# EAGLE board MApping Car (EAGLE 9.6.2)
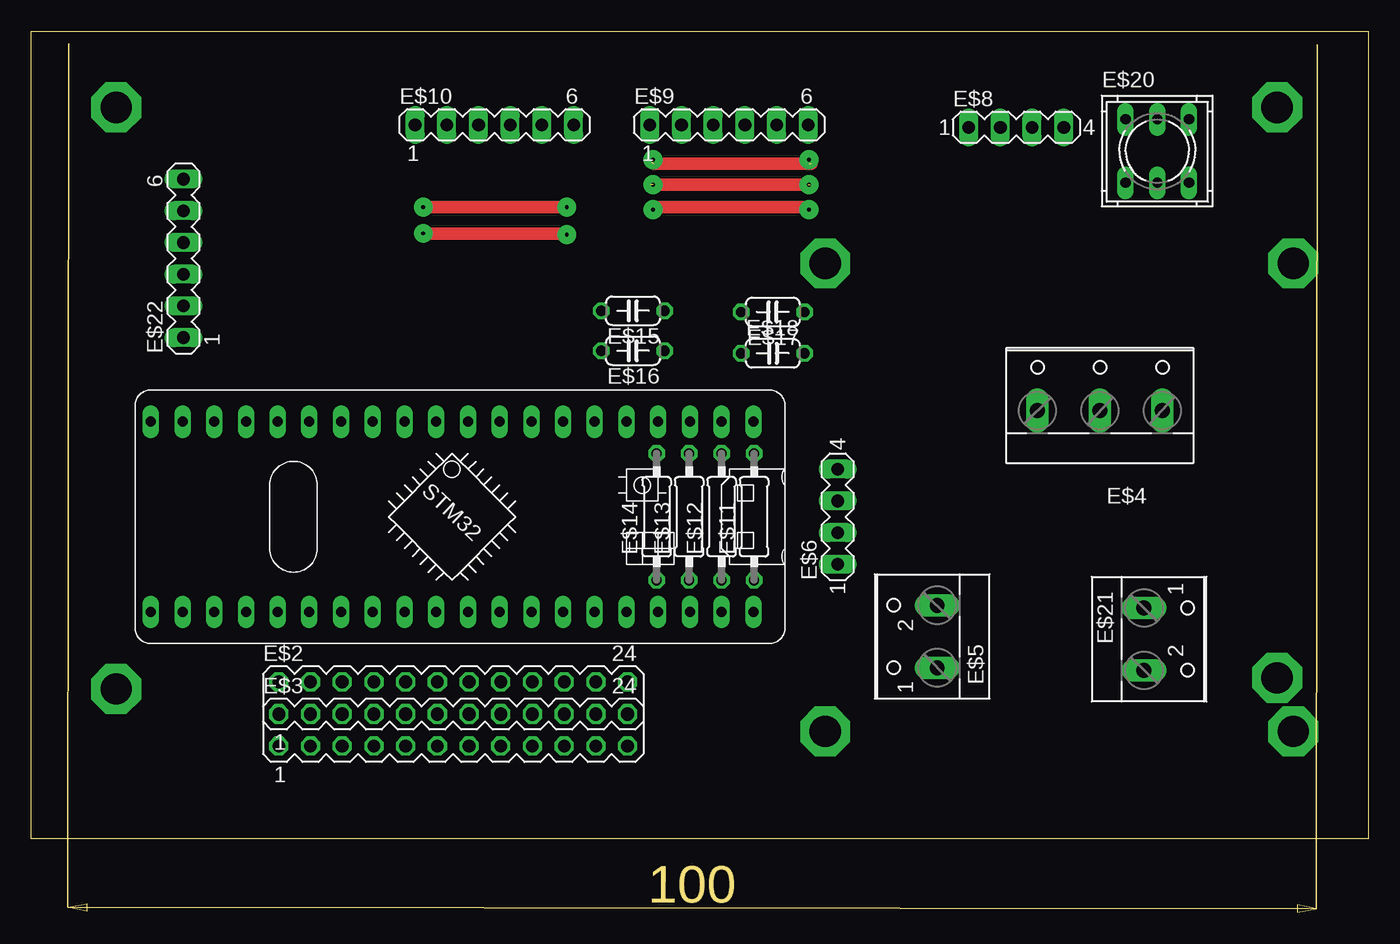
[diagram p0: board, top side]
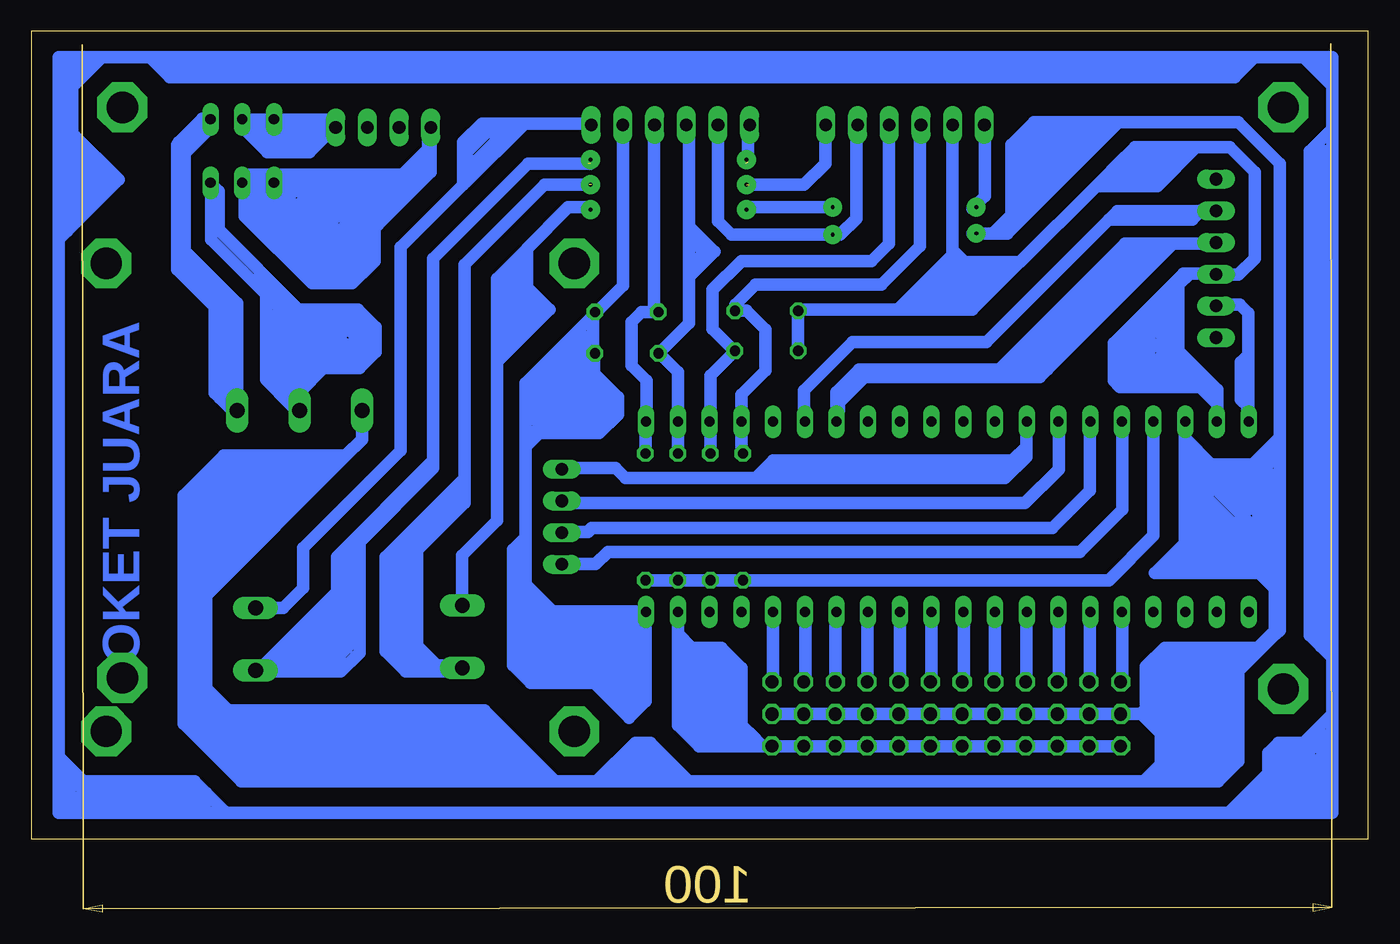
[diagram p1: board, bottom side, seen from below]

Size 107.1 x 64.7 mm. Coordinates in mm from the lower left corner, seen from the top.
Outline: 0,64.7 107.1,64.7 107.1,0 0,0 0,64.7
Copper layers (1*16): Top 0.035mm / dielectric 1.5mm / Bottom 0.035mm
Design rules "default *": minimum track width 6mil, minimum drill 0.35mm, track to track 0mil, track to pad 0mil, pad to pad 6mil, via to via 6mil, smd to smd 6mil, copper to edge 0mil, drill to drill 0mil, minimum pad ring 10mil, minimum via ring 8mil, stop-mask expansion 4mil, vias tented up to drill 0mil, thermal gap 0mil

## Footprints (pad centres in the part's own frame; a part is rotated, then mirrored left to right if it is on the bottom)
BLUE_PILL = drill 0.8 long: P$1 -7.62,15.24; P$2 -7.62,12.7; P$3 -7.62,10.16; P$4 -7.62,7.62; P$5 -7.62,5.08; P$6 -7.62,2.54; P$7 -7.62,0; P$8 -7.62,-2.54; P$9 -7.62,-5.08; P$10 -7.62,-7.62; P$11 -7.62,-10.16; P$12 -7.62,-12.7; P$13 -7.62,-15.24; P$14 -7.62,-17.78; P$15 -7.62,-20.32; P$16 -7.62,-22.86; P$17 -7.62,-25.4; P$18 -7.62,-27.94; P$19 -7.62,-30.48; P$20 -7.62,-33.02; P$21 7.62,15.24; P$22 7.62,12.7; P$23 7.62,10.16; P$24 7.62,7.62; P$25 7.62,5.08; P$26 7.62,2.54; P$27 7.62,0; P$28 7.62,-2.54; P$29 7.62,-5.08; P$30 7.62,-7.62; P$31 7.62,-10.16; P$32 7.62,-12.7; P$33 7.62,-15.24; P$34 7.62,-17.78; P$35 7.62,-20.32; P$36 7.62,-22.86; P$37 7.62,-25.4; P$38 7.62,-27.94; P$39 7.62,-30.48; P$40 7.62,-33.02
MA12-2 = drill 1.016 octagon: 1 -13.97,-1.27; 2 -13.97,1.27; 3 -11.43,-1.27; 4 -11.43,1.27; 5 -8.89,-1.27; 6 -8.89,1.27; 7 -6.35,-1.27; 8 -6.35,1.27; 9 -3.81,-1.27; 10 -3.81,1.27; 11 -1.27,-1.27; 12 -1.27,1.27; 13 1.27,-1.27; 14 1.27,1.27; 15 3.81,-1.27; 16 3.81,1.27; 17 6.35,-1.27; 18 6.35,1.27; 19 8.89,-1.27; 20 8.89,1.27; 21 11.43,-1.27; 22 11.43,1.27; 23 13.97,-1.27; 24 13.97,1.27
W237-103 = drill 1.194 long: 1 -5,-1.29; 2 0,-1.29; 3 5,-1.29
W237-102 = drill 1.194 long: 1 -2.5,-1.27; 2 2.5,-1.27
MA04-1 = drill 1.016 long: 1 -3.81,0; 2 -1.27,0; 3 1.27,0; 4 3.81,0
MA06-1 = drill 1.016 long: 1 -6.35,0; 2 -3.81,0; 3 -1.27,0; 4 1.27,0; 5 3.81,0; 6 6.35,0
0207/10 = drill 0.813 octagon: 1 -5.08,0; 2 5.08,0
C050-024X044 = drill 0.813 octagon: 1 -2.54,0; 2 2.54,0
9077-2 = drill 0.813 long: 1 -2.54,2.54; 2 0,2.54; 3 2.54,2.54; 4 -2.54,-2.54; 5 0,-2.54; 6 2.54,-2.54

## Placement (x,y rotation side)
E$1  [BLUE_PILL]  42.6,25.8 270 top
E$2  [MA12-2]  33.8,11.3 0 top
E$3  [MA12-2]  33.8,8.7 0 top
E$4  [W237-103]  85.6,35.6 0 top
E$5  [W237-102]  71.3,16.2 90 top
E$6  [MA04-1]  64.6,25.8 90 top
E$8  [MA04-1]  78.9,57 0 top
E$9  [MA06-1]  55.9,57.2 0 top
E$10  [MA06-1]  37.1,57.2 0 top
E$11  [0207/10]  57.9,25.8 90 top
E$12  [0207/10]  55.3,25.8 90 top
E$13  [0207/10]  52.7,25.8 90 top
E$14  [0207/10]  50.1,25.8 90 top
E$15  [C050-024X044]  48.2,42.3 180 top
E$16  [C050-024X044]  48.2,39.1 180 top
E$17  [C050-024X044]  59.4,42.2 180 top
E$18  [C050-024X044]  59.4,38.9 0 top
E$20  [9077-2]  90.2,55.1 0 top
E$21  [W237-102]  90.4,16 270 top
E$22  [MA06-1]  12.2,46.5 90 top

## Library data of the parts
E$1 = BluePill
E$2 E$3 E$6 E$8-E$10 E$22 = con-lstb
E$4 E$5 E$21 = con-wago-500
E$11-E$18 = rcl
E$20 = switch-misc

## Tracks (layer width: path | path; a pad name or v marks a point on that pad's centre or on a via)
S$1  (via drill 2.5 pad 4)
  other vias: 6.8,58.6
S$2  (via drill 2.5 pad 4)
  other vias: 99.8,58.6
S$3
  Bottom 1: 19.7,18.2 19.7,12.7 19.9,12.5
S$4
  Bottom 1: 22.3,18.2 22.3,12.6 22.4,12.5
S$5
  Bottom 1: 24.8,18.1 24.8,12.7 24.9,12.6
S$6
  Bottom 1: 27.4,18.1 27.4,12.7 27.5,12.6
S$7
  Bottom 1: 29.9,18.2 29.9,12.7 30,12.6
S$8
  Bottom 1: 32.4,18.2 32.4,12.7 32.6,12.5
S$9
  Bottom 1: 47.7,18.1 47.7,12.8 47.9,12.6
S$10
  Bottom 1: 45.1,18.2 45.1,12.8 45.3,12.6
S$11
  Bottom 1: 42.7,18.4 42.7,12.6
S$12
  Bottom 1: 40.1,18.2 40.1,12.6 40.2,12.5
S$13
  Bottom 1: 37.5,18.2 37.5,12.7 37.6,12.6
S$14
  Bottom 1: 35,18.2 35,12.7 35.1,12.6
S$15
  Bottom 1: 55.3,16.4 55.3,9.1 53.6,7.4 48.5,7.4 | 48.5,7.4 19.8,7.4 | 55.3,18.3 55.3,16.4 | 55.3,16.4 54.2,15.3 51.8,15.3 50.2,13.7 50.2,9.1 49.1,8 | 48.5,7.4 49.1,8 | 49.1,8 53.2,8 54.6,9.4 54.6,14.8 52.5,14.8 50.7,13 50.7,8.7 52.7,8.7 52.8,8.6 54.1,9.9 54.1,14 53,14 52.9,14.1 51.5,12.7 51.5,9.4 52.5,9.4 53.4,10.3 53.4,13.3 53.2,13.3 52.4,12.5 52.4,10.2
S$17
  Bottom 1: 57.9,33.4 57.9,30.9
S$18
  Bottom 1: 55.3,33.4 55.3,31
S$19
  Bottom 1: 50.7,39.1 52.7,37.1 52.7,30.8
S$20
  Bottom 1: 50.2,33.4 50.2,30.9
S$21
  Bottom 1: 57.9,20.7 50.2,20.7
S$22
  Bottom 1: 17.2,33.6 17.2,24.3 20.8,20.7 50.1,20.7
S$23
  Bottom 1: 65.6,29.7 60.3,29.7 59.5,28.9 49.1,28.9 | 49.1,28.9 29.1,28.9 27.4,30.6 27.4,31.4 | 27.4,31.4 27.4,33.5 | 49.1,28.9 47.7,30.3 28.5,30.3 | 28.5,30.3 27.4,31.4 | 28.5,30.3 29,29.8 29,29.6 47.7,29.6
S$24
  Bottom 1: 65.1,26.9 27.5,26.9 24.8,29.6 24.8,33.4
S$25
  Bottom 1: 65.6,24.6 62.5,24.6 62.2,24.9 25.3,24.9 22.3,27.9 22.3,33.3
S$26
  Bottom 1: 65.6,22 61.9,22 60.9,23 23.1,23 19.7,26.4 19.7,33.5
S$27
  Bottom 1: 45.2,33.7 45.2,35.9 41.3,39.8 30.6,39.8 20.8,49.6 | 20.8,49.6 20.1,50.3 12.3,50.3 | 13.3,50.4 14.1,49.6 20.8,49.6
S$28
  Bottom 1: 50.7,42.3 49.8,42.3 48.3,40.8 48.3,37.5 50.2,35.6 50.2,33.5
S$29
  Bottom 1: 55.3,33.5 55.3,37.4 56.8,38.9 54.4,41.3 54.4,45 | 54.4,45.7 54.4,49.1 | 54.4,49.1 54.4,56.44 | 54.4,49.1 52.35,47.05 54.4,45 | 54.4,45 54.4,45.7 | 54.4,45.7 53.15,46.95 53.9,47.7
S$30
  Bottom 1: 57.8,33.5 57.8,36.7 59,37.9 59,41.4 58.2,42.2 57.2,42.2 57.2,57.2
S$31
  Bottom 1: 62.1,42.2 62.1,39.1 62,39
S$32
  Bottom 1: 45.7,42.4 45.7,39.1
S$33
  Bottom 1: 50.8,39.1 52.52,40.82 52.52,44 50.22,46.3 39.8,46.3 38.4,47.7 38.4,57
S$34
  Bottom 1: 50.7,42.2 50.7,42.8 49.1,44.4 39,44.4 35.9,47.5 35.9,57.1
S$35
  Bottom 1: 92.9,57.7 93.4,57.7 95.3,55.8 94.4,55.8 | 94.4,55.8 93.4,56.8 | 94.4,55.8 94.6,55.6 95.4,55.6 95.4,45.6 90.6,40.8 | 92.7,57.8 92.7,57 94.8,54.9 94.8,45.6 90.6,41.4 | 90.6,41.4 90.6,40.8 | 90.6,40.8 90.6,34.4 | 90.6,41.4 90.6,42.9 95.1,47.4 | 95.1,47.4 95.1,48.2 | 95.1,47.4 95.1,46.8 91.3,43
S$36
  Bottom 1: 59.7,57.2 59.7,44.3 67.5,36.5 67.5,31.9 | 62,38.8 62,37.4 67.5,31.9 | 67.5,31.9 67.5,31.4 | 67.5,31.4 67.5,20.4 65.3,18.2 58,18.2 57.9,18.1 | 67.5,31.4 66.4,32.5 61.6,32.5 60.1,34 60.1,35.4 62.7,38 62.7,40.2 66.5,36.4 66.7,36.4 66.8,36.3 66.8,33.6 66.5,33.3 61.9,33.3 60.8,34.4 60.8,34.9 63.2,37.3 63.2,38.6 66.2,35.6 66.2,34.3 62.4,34.3 61.9,33.8 61.7,34 61.7,34.5 63.9,36.7 63.9,36.8 | 63.9,37 63.9,36.8 | 63.9,36.8 65.5,35.2 65.5,35 63.1,35
S$37
  Bottom 1: 41,57.1 41,49.7 42.3,48.4 51,48.4 52.1,49.5 52.1,57.2
S$38
  Bottom 1: 93.8,44.2 92.4,42.8 92.4,35.7 92,35.3 | 90.7,34 92,35.3 | 92,35.3 92,41.1 91.3,40.4 91.3,35.9
S$39
  Bottom 1: 12.4,45.3 14.3,45.3 | 14.3,45.3 15.2,44.4 15.2,39.1 12.1,36 12.1,34.9 | 14.3,45.3 14.8,45.3 20.4,39.7 20.4,36.7 19.9,36.2 13.5,36.2 12.1,34.8 | 12.1,34.8 12.1,33.3 | 12.1,34.8 12.1,34.9 | 12.1,34.9 14.8,37.6 14.9,37.5 14.9,37 19.3,37 19.4,37.1 19.4,39.7 15.8,43.3 | 15.8,43.3 15.8,43.4 | 15.8,43.3 15.8,38.4 15.2,37.8 18.6,37.8 18.6,39.2 16.5,41.3 | 16.5,41.3 16.5,41.7 | 16.5,41.3 16.5,38.4 | 16.4,38.3 16.5,38.4 | 16.5,38.4 17.8,38.4 17.8,38.9 17.1,39.6
S$40
  Top 1: 42.7,48.5 31.6,48.5
S$41  (via drill 2.5 pad 4)
  other vias: 63.6,46.1
S$42  (via drill 2.5 pad 4)
  other vias: 101.1,46.1
S$43  (via drill 2.5 pad 4)
  other vias: 101.1,8.6
S$44  (via drill 2.5 pad 4)
  other vias: 63.6,8.6
S$45
  Bottom 1: 82.8,57 84.8,55 88.2,55 90.2,57 90.2,57.6 83.3,57.6 82.8,57.1 83,56.9 89.2,56.9 | 89.3,56.9 89.2,56.9 | 89.2,56.9 88.1,55.8 84.9,55.8 84.5,56.2 84.7,56.4 87.6,56.4
S$46
  Bottom 1: 75.1,57.2 75.1,53.4 79.3,49.2 | 79.3,49.2 79.6,48.9 79.6,48.8 | 79.6,48.8 86.6,48.8 | 86.6,48.8 88.7,48.8 | 90,50.2 89,49.2 89,49.1 88.7,48.8 | 90,50.2 90,52.6 82.8,52.6 | 90,50.2 90,49.9 84.6,44.5 81.4,44.5 79.6,46.3 79.6,48.8 | 79.3,49.2 79.3,49.7 75.3,53.7 75.3,55.3 | 75.3,56.8 75.3,55.3 | 75.3,55.3 77.4,53.2 82.2,53.2 | 85.7,49.7 86.6,48.8 | 88.7,48.8 84.5,44.6 81.3,44.6 80,45.9 80,49.7 77.2,52.5 | 75.8,53.9 77.2,52.5 | 77.2,52.5 82.4,52.5 87.3,47.6 85,45.3 80.8,45.3 80.8,49.6 78.7,51.7 78.7,52.1 82.2,52.1 86.1,48.2 88,48.2 85.8,46 81.5,46 81.5,49.7 79.9,51.3 82.3,51.3 86.3,47.3 86.3,47.1 85.6,47.1 85.1,46.6 81.9,46.6 81.9,50.1 81.4,50.6 82.3,50.6 82.3,50.2 85,47.5 84.8,47.3 82.7,47.3 82.7,47.9 82.5,48.1 83.9,48.1 | 82.8,52.6 82.2,53.2 | 82.8,52.6 85.7,49.7 | 85.7,49.7 88.7,49.7 88.7,49.9 89.6,50.8 89.6,51.9 84.6,51.9 | 84.1,51.9 84.6,51.9 | 84.6,51.9 86,50.5 88.5,50.5 89,51 88.9,51.1 86.3,51.1 87.7,52.5 90.3,52.5 89.6,53.2 82.2,53.2
S$47
  Bottom 1: 9,21.7 13.7,26.4 14,26.4 14.2,26.6 | 14.7,33.4 14.7,32.1 | 14.7,32.1 14.7,28.4 | 14.7,26.2 11.1,22.6 | 11.1,22.6 9.7,22.6 | 8.92,21.82 7.5,20.4 7.5,20 | 7.5,19.4 7.5,16.7 | 7.5,16.7 8.9,15.3 | 8.9,15.3 10.3,13.9 14.3,13.9 18.2,10 | 18.2,10 47.8,10 | 18.2,10 16.6,8.4 16.6,6 18,4.6 | 18,4.6 54.4,4.6 | 55.6,4.6 61.8,4.6 | 61.8,4.6 65.1,4.6 | 69.2,4.6 90.3,4.6 94.9,9.2 94.9,27.5 91.7,30.7 81.9,30.7 | 81.9,30.7 80.6,32 80.6,34.3 | 14.6,30 13.6,30 | 12.3,30 9.3,30 7.1,32.2 | 7.1,32.2 7.1,54.1 10.4,57.4 20,57.4 | 20,57.4 28.9,48.5 30.1,48.5 | 30.1,48.5 31.7,48.5 | 14.7,32.1 12.6,30 | 12.6,30 12.3,30 | 12.6,30 13.6,30 | 13.6,30 14.1,30.5 | 12.3,30 14.7,27.6 | 14.7,27.6 14.7,26.2 | 14.7,27.6 14.7,28.4 | 14.7,28.4 13.9,29.2 | 14.2,28.7 14.2,27.1 | 14.2,27.1 9.7,22.6 | 9.7,22.6 8.4,21.3 9.7,21.3 | 9.7,21.3 9.8,21.3 | 9.8,21.3 11.1,22.6 | 20,57.4 26.8,57.4 28.6,55.6 28.6,50 | 28.6,50 30.1,48.5 | 28.6,50 21.9,56.7 21.9,56.9 21.2,56.9 21.1,56.8 21.2,56.7 26.5,56.7 27.9,55.3 27.9,51.6 | 27.9,51.6 28,51.5 | 27.9,51.6 23.4,56.1 | 23.4,56.1 23.3,56.1 | 23.4,56.1 26.1,56.1 27.2,55 27.2,53 24.8,55.4 | 24.8,55.4 24.5,55.4 | 24.8,55.4 25.8,55.4 26.3,54.9 26.5,54.9 26.6,54.8 26.6,54.5 | 81.9,30.7 93.1,19.5 93.1,12.1 91.2,10.2 91.1,10.3 70.8,10.3 65.1,4.6 | 65.1,4.6 69.2,4.6 | 69.2,4.6 72.3,7.7 | 74.2,9.1 92.7,9.1 93.8,10.2 | 8.9,15.3 14.9,15.3 | 14.9,15.3 16.3,15.3 17.8,13.8 17.8,10.8 16.5,9.5 16.5,6 17.9,4.6 | 17.9,4.6 18,4.6 | 17.9,4.6 12,4.6 10.4,6.2 10.4,14.7 15.7,14.7 16.9,13.5 16.9,11.9 16.5,11.5 16.5,10.4 16,9.9 16,5.7 16.3,5.4 | 16.4,5.3 16.3,5.4 | 16.3,5.4 12.2,5.4 11,6.6 11,13.2 14.8,13.2 15.4,13.8 16.3,12.9 16.3,11.1 15,9.8 15,6 12.2,6 12,6.2 12,12.3 11.9,12.4 15.1,12.4 15.1,11.9 15.5,11.5 15.5,8.2 14,6.7 12.8,6.7 12.8,11.5 13,11.7 13.3,11.4 14.8,11.4 14.8,10.5 14.1,9.8 14.1,7.8 13.6,7.3 13.4,7.3 13.4,10.2 13.9,10.7 13.8,10.7 13.7,10.6
  Bottom 1: 14.2,26.6 14.2,27.1 | 14.2,26.6 14.2,25.8 9.7,21.3 | 9.8,21.3 17.1,21.3 14.7,23.7 14.7,25.6 | 14.7,26.2 14.7,25.6 | 14.7,25.6 11.3,22.2 11.3,22 15.5,22 15.6,22.1 14.2,23.5 14.2,23.9 13.7,23.9 12.5,22.7 12.6,22.6 14.2,22.6 | 14.4,22.6 14.2,22.6 | 14.2,22.6 13.8,23 | 7.1,32.2 7.1,16.7 7.4,16.4 | 7.5,16.7 7.4,16.8 | 7.4,16.4 7.4,16.8 | 7.4,16.8 7.4,19.5 | 7.4,26.5 7.4,19.5 | 7.4,19.5 7.5,19.4 | 7.5,19.4 7.5,20 | 7.5,20 9.1,21.6 9.1,23.5 13.3,27.7 13.3,28.1 11.9,29.5 8.1,29.5 8.1,21.8 8.3,21.6 13.5,26.8 13.5,27.5 13,27.5 10.9,29.6 8.5,29.6 7.8,30.3 | 7.8,30.3 7.8,30.7 | 7.8,30.3 7.8,30.2 9.5,28.5 10.9,28.5 11.7,27.7 11.9,27.7 8.8,24.6 | 8.8,24.6 8.8,24.1 | 8.8,24.6 8.8,28.3 9.5,27.6 10.8,27.6 | 10.9,27.6 10.8,27.6 | 10.8,27.6 9.6,26.4 9.5,26.5 9.5,26.9 | 61.8,4.6 58.7,7.7 57.5,7.7 54.4,4.6 | 54.4,4.6 55.6,4.6 | 55.6,4.6 57.9,6.9 58.1,6.9 59.8,5.2 | 59.8,5.2 60.1,5.2 | 59.8,5.2 57.1,5.2 | 57.1,5.2 57,5.1 | 57.1,5.2 57.7,5.8 58.1,5.8 | 7.4,16.4 10.4,13.4 11.3,13.4 | 14.9,15.3 14.9,14.3
  Bottom 2: 93.8,10.2 93.8,26.9 90.9,29.8 83.8,29.8 92.4,21.2 92.4,25.6 89.9,28.1 87.5,28.1 | 86.9,28.1 87.5,28.1 | 87.5,28.1 91.1,24.5
  Bottom 3: 72.3,7.7 72.3,8.7 71.9,9.1 68.4,5.6 67.7,5.6 68.6,6.5 90.1,6.5 93.4,9.8 93.4,10.3 93,10.3 91.5,8.8 74.5,8.8 74.2,9.1
S$48
  Bottom 1: 57.9,18.2 57.9,11 59.2,9.7 62,12.5 67.1,12.5 68.5,13.9 68.5,23.2 67.6,24.1 67.6,14 66.8,13.2 58.5,13.2 58.4,13.3 58.4,17.3 58.3,17.4 58.5,17.6 66.4,17.6 67.2,18.4 67.2,18.9 66.8,18.9 66.2,18.3 67,17.5 67,14.1 66.7,13.8 58.9,13.8 58.9,16.5 59.3,16.9 66.4,16.9 66.4,14.6 66.3,14.5 59.8,14.5 59.8,16 59.7,16.1 59.8,16.2 65.5,16.2 65.5,15.7 65.7,15.5 65.6,15.4 60.7,15.4 60.7,13 61.2,12.5 61.1,12.4 58.6,12.4 58.6,11.4 59.3,10.7 59.3,10.6 60.4,11.7 60.4,11.8 59.4,11.8 59.3,11.7
S$49  (2 unrouted)
  Top 1: 49.9,54.1 62.5,54.1
  Bottom 1: 49.7,57.1 49.7,54.2 | 62.3,54.1 67.3,54.1 74.9,46.5 74.9,30.3 | 74.9,30.3 82.6,22.6 82.6,22.1 | 82.6,19.8 82.6,16.6 85.7,13.5 89.1,13.5 | 74.9,30.3 74.9,29.7 80.8,23.8 80.8,14.9 82.3,13.4 89,13.4 82.6,19.8 | 82.6,19.8 82.6,22.1 | 82.6,22.1 81.8,22.9 | 81.7,23 81.8,22.9 | 81.8,22.9 81.8,15.3 83,14.1 87.2,14.1 83.1,18.2 83.1,16.5 82.5,15.9 83.5,14.9 83.5,14.7 85.6,14.7 | 85.8,14.7 85.6,14.7 | 85.6,14.7 83.7,16.6
S$50
  Bottom 1: 62.2,57.3 67.6,57.3 | 67.6,57.3 72.3,52.6 | 72.5,52.4 77.5,47.4 77.5,31.1 85.3,23.3 85.3,20.1 86.9,18.5 89.1,18.5 | 67.6,57.3 71,57.3 72.5,55.8 72.5,52.4 | 72.5,52.4 72.3,52.6 | 72.3,52.6 72.3,54.9 70.6,56.6 69.2,56.6 71.5,54.3 71.7,54.3
S$51  (2 unrouted)
  Top 1: 49.6,52.4 62.4,52.4
  Bottom 1: 43.5,57.1 43.5,54.1 45.2,52.4 49.8,52.4 | 62.2,52.4 66,52.4 72.4,46 72.4,28.9 | 72.4,28.9 72.4,26.9 76.2,23.1 76.2,15.5 74.4,13.7 72.8,13.7 | 72.4,28.9 78.7,22.6 78.7,15 77.1,13.4 73.1,13.4 72.8,13.7 | 72.8,13.7 73,13.9 76.6,13.9 76,14.5 76.2,14.5 76.6,14.9 | 76.6,14.9 76.6,14.3 | 76.6,14.9 76.6,23.9 | 76.6,23.9 73.2,27.3 | 76.6,23.9 77.8,22.7 77.8,15.2 77.2,14.6 | 77.2,14.6 77.2,14.5 | 77.2,14.6 77.2,22.4 | 77.2,22.4 77.3,22.5 | 77.2,22.4 77,22.2 76.9,22.2
S$52  (via drill 0.3 pad 1.5)
  Top 1: 62.3,50.6 49.8,50.6 | 42.7,50.6 31.8,50.6 31.7,50.5
  Bottom 1: 72.6,18.7 72.6,22.7 69.8,25.5 69.8,38.2 | 69.8,39 69.8,44.9 67.4,47.3 | 67.4,47.3 64.1,50.6 62.3,50.6 | 49.8,50.6 v42.9,50.6 42.7,50.6 | 31.7,50.5 30.7,51.5 30.7,57.2 | 67.4,47.3 67.4,44.2 65.6,42.4 69.8,38.2 | 69.8,38.2 69.8,39 | 69.8,39 68,40.8 68,45.6 | 68,45.7 68,45.6 | 68,45.6 69,44.6 69,40.5 68.9,40.4 67,42.3 66.7,42.3 67.6,43.2
S$53
  Bottom 1: 92.7,52.6 92.7,52.5 | 92.7,52.5 92.1,51.9 92.1,48.8 | 85.6,34.3 85.6,40.9 88.3,43.6 | 88.3,43.6 92.7,48 92.7,49.4 | 92.7,49.4 92.7,52.5 | 92.7,49.4 92.1,48.8 | 92.1,48.8 85.7,42.4 80.9,42.4 79.5,41 79.5,39 80.8,37.7 83.7,37.7 85.6,35.8 | 85.6,35.8 85.6,34.2 | 85.6,35.8 85.6,36.9 83.9,38.6 81.2,38.6 80.3,39.5 80.3,40.5 81.2,41.4 81.2,41.6 85.9,41.6 84.9,40.6 84.9,38.3 83.6,39.6 81.5,39.6 81,40.1 81.6,40.7 84.2,40.7 84.3,40.8 | 84.4,40.9 84.3,40.8 | 84.3,40.8 84.3,39.7 82.7,39.7 82.3,40.1 84,40.1 | 88.3,43.6 88.3,36.8 86.3,34.8 | 85.6,34.1 86.3,34.8 | 86.3,34.8 86.3,40.4 87.6,41.7 | 87.6,41.7 87.6,41.9 | 87.6,41.7 87.6,37.4 86.9,36.7 | 86.9,36.7 86.9,36.4 | 86.9,36.7 86.9,40.2
S$55
  Bottom 1: 45.6,42.4 37.7,42.4 | 37.7,42.4 33.3,42.4 | 33.3,42.4 31.7,42.4 27.9,46.2 | 27.9,46.2 21.8,52.3 | 19.5,54.6 18.7,55.4 13.8,55.4 | 13.8,55.4 11.1,55.4 9.1,53.4 9.1,46.5 10.4,45.2 12.2,45.2 | 33.3,56.9 33.3,47.2 | 33.3,47.2 33.3,46.8 | 33.3,45.9 33.3,42.4 | 13.8,55.4 16.9,52.3 21.8,52.3 | 21.8,52.3 19.5,54.6 | 19.5,54.6 15.9,54.6 | 15.3,54.6 15.9,54.6 | 15.9,54.6 17.6,52.9 20.2,52.9 19.3,53.8 17.4,53.8 | 33.3,47.2 32.3,46.2 28.9,46.2 | 27.9,46.2 28.9,46.2 | 28.9,46.2 31.8,43.3 32.6,43.3 32.6,45.9 | 32.6,45.9 32.7,46 | 32.6,45.9 32.2,45.5 30.6,45.5 | 30.5,45.5 30.6,45.5 | 30.6,45.5 32.1,44 32.2,44 32.2,44.7 32,44.9 | 37.7,42.4 33.3,46.8 | 33.3,46.8 33.3,45.9 | 33.3,45.9 36.2,43 34.1,43 34.1,44 33.9,44.2 33.9,44.4 34.1,44.4 34.9,43.6
S$56  (via drill 0.3 pad 1.5)
  other vias: 31.4,50.6
S$57  (via drill 0.3 pad 1.5)
  other vias: 31.4,48.5
S$58  (via drill 0.3 pad 1.5)
  other vias: 42.9,48.4
S$59  (via drill 0.3 pad 1.5)
  other vias: 49.8,54.4
S$60  (via drill 0.3 pad 1.5)
  other vias: 49.8,52.4
S$61  (via drill 0.3 pad 1.5)
  other vias: 49.8,50.4
S$62  (via drill 0.3 pad 1.5)
  other vias: 62.3,54.4
S$63  (via drill 0.3 pad 1.5)
  other vias: 62.3,52.4
S$64  (via drill 0.3 pad 1.5)
  other vias: 62.3,50.4
S$65
  Bottom 1: 5.2,62.6 2.9,62.6 2.9,61.1 | 5.2,62.6 9.1,62.6 | 9.1,62.6 96.2,62.6 | 97.6,62.6 101.4,62.6 | 101.4,62.6 104.9,62.6 104.9,48 | 104.9,48 104.9,6.6 | 104.9,6.6 104.9,2.1 11.2,2.1 | 10.3,2.1 2.9,2.1 2.9,10 | 2.9,10 2.9,14.5 | 2.9,14.5 2.9,56.9 | 2.9,56.9 2.9,60.3 | 9.1,62.6 10.7,61 96,61 97.6,62.6 | 97.6,62.6 96.2,62.6 | 96.2,62.6 95.6,62 | 2.9,56.9 4.7,55.1 4.7,16.3 3.8,15.4 | 2.9,14.5 3.8,15.4 | 3.8,15.4 3.8,54.7 3.4,55.1 | 5.2,62.6 2.9,60.3 | 2.9,60.3 2.9,61.1 | 2.9,61.1 3.7,61.9 | 2.9,10 5.2,7.7 7.2,7.7 8,6.9 8,5.3 11.2,2.1 | 11.2,2.1 10.3,2.1 | 10.3,2.1 9.5,2.9 3.7,2.9 3.7,8.1 | 3.7,8.1 3.5,8.3 | 3.7,8.1 8.4,3.4 | 8.4,3.4 8.8,3.4 | 8.4,3.4 4.6,3.4 4.4,3.6 4.4,6.2 | 4.4,6.2 4.3,6.3 | 4.4,6.2 6.2,4.4 7,4.4 6.8,4.2 5.3,4.2 5.1,4.4 5.1,6.5 5.6,7 6.9,7 6.9,6.8 7.4,6.3 7.4,5.3 8.4,4.3 8.4,4 6.4,6 6.4,6.4 | 101.4,62.6 103.8,60.2 103.8,56.5 100.1,52.8 104.2,48.7 | 104.9,48 104.2,48.7 | 104.2,48.7 104.2,61.3 103.6,61.9 103.1,61.9 | 102.9,61.9 103.1,61.9 | 103.1,61.9 103.6,61.4 103.8,61.4 104.3,61.9 104.3,55.9 100.8,52.4 102.9,50.3 103.6,50.3 103.6,54 103.4,54.2 101.8,52.6 101.8,52.3 101.9,52.3 102.8,51.4 | 103,51.2 102.8,51.4 | 102.8,51.4 102.8,52.9 | 104.9,6.6 102.9,4.6 94,4.6 93.1,3.7 | 91.6,2.2 93.1,3.7 | 93.1,3.7 102.7,3.7 104,5 | 104.1,5.1 104,5 | 104,5 104,2.9 103.6,3.3 93.8,3.3 93.2,2.7 103.2,2.7 103.3,2.6
  Bottom 2: 95.6,62 11.3,62 11,61.7
S$66  (via drill 2.5 pad 4)
  other vias: 6.8,12
S$67  (via drill 2.5 pad 4)
  other vias: 99.8,12.9
S$68
  Bottom 1: 42.4,34.3 42.4,34.9 40.3,37 26.3,37 25.7,37.6 | 42.6,33.6 42.6,35.8 40.8,37.6 29.6,37.6 | 29.6,37.6 19.5,47.7 12.3,47.7 | 15.6,47.7 25.7,37.6 | 25.7,37.6 28.7,37.6 | 29.6,37.6 28.7,37.6 | 28.7,37.6 19.2,47.1 16.9,47.1 25.6,38.4 26.8,38.4 | 27.1,38.4 26.8,38.4 | 26.8,38.4 18.7,46.5 18.4,46.5
S$69
  Bottom 1: 9.7,34 9.7,34.7 10.2,35.2 10.2,38.2 9.6,38.8 | 12.2,42.8 10.3,42.8 9.6,42.1 9.6,38.8 | 9.6,38.8 9.6,33.5

## Text on the board
Bottom: SOKET JUARA